# EAGLE board fMeter-preamp (EAGLE 5.07)
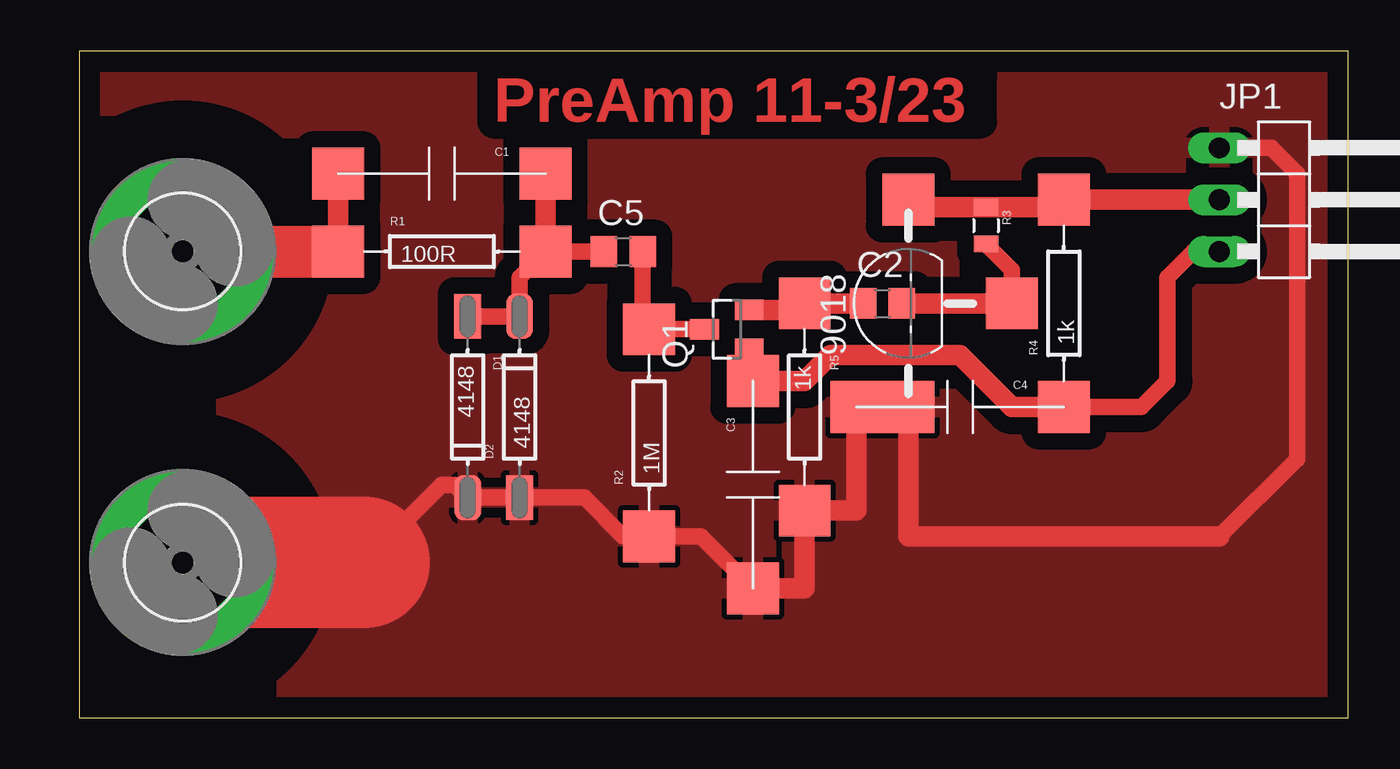
[diagram p0: board, top side]

Size 62.21 x 32.69 mm. Coordinates in mm from the lower left corner, seen from the top.
Outline: 0,0 62.21,0 62.21,32.69 0,32.69 0,0
Copper layers (1*16): Top 0.035mm / dielectric 1.5mm / Bottom 0.035mm
Design rules "default": minimum track width 10mil, minimum drill 24mil, track to track 8mil, track to pad 8mil, pad to pad 8mil, via to via 8mil, smd to smd 8mil, copper to edge 40mil, drill to drill 8mil, minimum pad ring 10mil, minimum via ring 8mil, stop-mask expansion 4mil, vias tented up to drill 0mil, thermal gap 10mil

## Footprints (pad centres in the part's own frame; a part is rotated, then mirrored left to right if it is on the bottom)
TO92-EBC-SMD = smd 2.54 x 2.54: B 0,-5.08; C 5.08,0; E -5.08,0
CAP-SMD-SMALL = smd 2.54 x 2.54: P$1 5.08,0; P$2 -5.08,0
C0805 = smd 1.3 x 1.5: 1 -0.95,0; 2 0.95,0
DIODE-IN4148-SMD = smd 2.184 x 1.321: A -4.445,0; C 4.445,0
5,5-PAD = drill 5.5 pad 9 round: B5,5 0,0
1X03/90 = drill 1.016 long: 1 -2.54,-3.81; 2 0,-3.81; 3 2.54,-3.81
SOT23 = smd 1 x 1.4: 1 -0.95,-1.1; 2 0.95,-1.1; 3 0,1.1
AXIAL-0.3-SMD = smd 2.54 x 2.54: P$1 -5.08,0; P$2 5.08,0
0805 = smd 0.8 x 1.2: 1 -0.9,0; 2 0.9,0

## Placement (x,y rotation side)
9018  [TO92-EBC-SMD]  40.64,20.32 90 top
C1  331  [CAP-SMD-SMALL]  17.78,26.67 180 top
C2  103  [C0805]  39.37,20.32 0 top
C3  103  [CAP-SMD-SMALL]  33.02,11.43 270 top
C4  103  [CAP-SMD-SMALL]  43.18,15.24 180 top
C5  103  [C0805]  26.67,22.86 0 top
D1  4148  [DIODE-IN4148-SMD]  19.05,15.24 270 top
D2  4148  [DIODE-IN4148-SMD]  21.59,15.24 90 top
H1  Ban_GND  [5,5-PAD]  5.08,7.62 0 top
H2  BanPlug  [5,5-PAD]  5.08,22.86 0 top
JP1  [1X03/90]  59.69,25.4 270 top
Q1  SST5485  [SOT23]  31.75,19.05 90 top
R1  100R  [AXIAL-0.3-SMD]  17.78,22.86 0 top
R2  1M  [AXIAL-0.3-SMD]  27.94,13.97 90 top
R3  15k  [0805]  44.45,24.13 270 top
R4  1k  [AXIAL-0.3-SMD]  48.26,20.32 90 top
R5  1k  [AXIAL-0.3-SMD]  35.56,15.24 270 top

## Library data of the parts
9018 C1-C5 D1 D2 R1-R5 = digital-toy
H1 H2 = holes
JP1 = pinhead
Q1 = transistor-fet

## Nets
GND: 9018.E C3.P$1 C4.P$1 D1.C D2.A H1.B5,5 JP1.1 R2.P$1 R5.P$2
N$1: C1.P$1 H2.B5,5 R1.P$1
N$2: C1.P$2 C5.1 D1.A D2.C R1.P$2
N$3: C2.1 Q1.2 R5.P$1
N$4: 9018.B C2.2 R3.2
N$5: 9018.C JP1.2 R3.1 R4.P$2
N$6: C5.2 Q1.3 R2.P$2
N$7: C3.P$2 C4.P$2 JP1.3 Q1.1 R4.P$1

## Tracks (layer width: path | path; a pad name or v marks a point on that pad's centre or on a via)
GND
  Top 0.813: 55.88,8.89 59.69,12.7 59.69,26.67 58.42,27.94 JP1.1 | 13.97,7.62 17.78,11.43 18.41,11.43 D1.C D2.A 24.77,10.79 26.67,8.89 R2.P$1 30.48,8.89 C3.P$1
  Top 1.016: C3.P$1 35.56,6.35 R5.P$2 38.1,10.16 C4.P$1 9018.E 40.64,8.89 55.88,8.89
  Top 6.452: H1.B5,5 13.97,7.62
  pour Top (isolate 0.813): 0,46.99 64.77,46.99 76.2,26.67 76.2,3.81 67.31,-15.24 2.54,-15.24 -11.43,1.27 -11.43,39.37
N$1
  Top 1.016: R1.P$1 C1.P$1
  Top 2.54: H2.B5,5 R1.P$1
N$2
  Top 0.813: D1.A D2.C 21.59,21.59 R1.P$2 C5.1
  Top 1.016: R1.P$2 C1.P$2
N$3
  Top 1.016: Q1.2 35.24,20 R5.P$1 C2.1
N$4
  Top 0.813: 9018.B 45.72,21.96 R3.2
  Top 1.016: C2.2 9018.B
N$5
  Top 1.016: 9018.C 41.01,25.03 R3.1 47.89,25.03 R4.P$2 JP1.2
N$6
  Top 0.813: C5.2 27.62,19.37 R2.P$2 Q1.3
N$7
  Top 0.813: C4.P$2 52.07,15.24 53.34,16.51 53.34,21.59 54.61,22.86 JP1.3
  Top 1.016: Q1.1 33.02,17.93 C3.P$2 35.56,16.51 36.83,17.78 43.18,17.78 45.72,15.24 C4.P$2

## Text on the board
Top: PreAmp 11-3/23